# EAGLE board barbuddy (EAGLE 7.7.0)
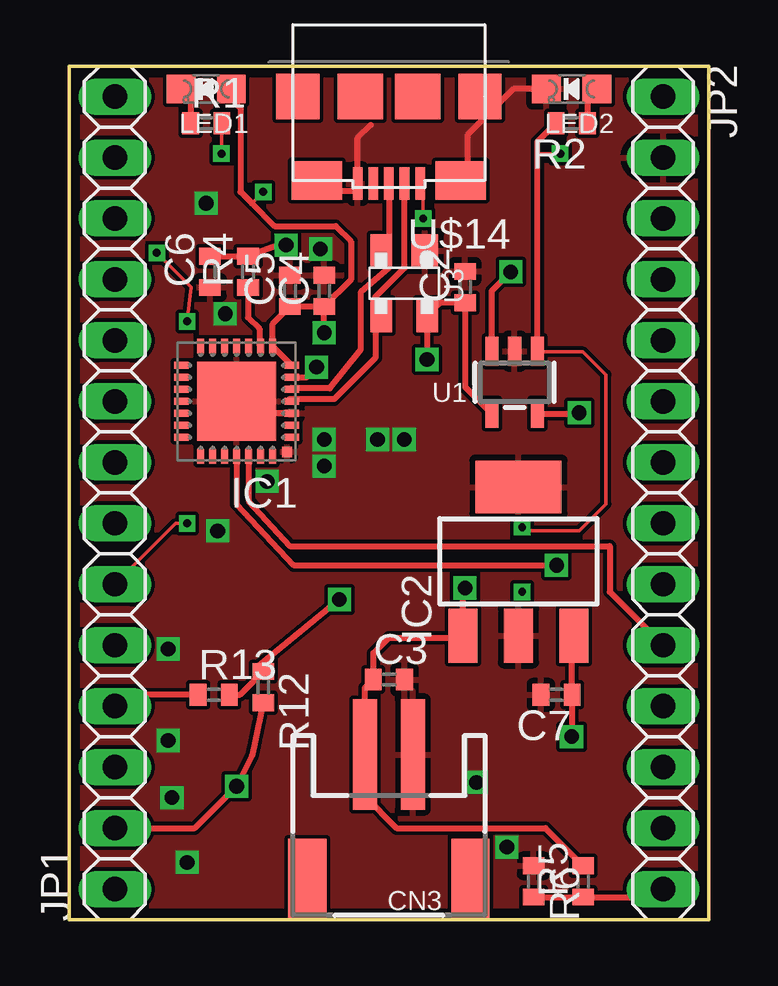
[diagram p0: board, top side]
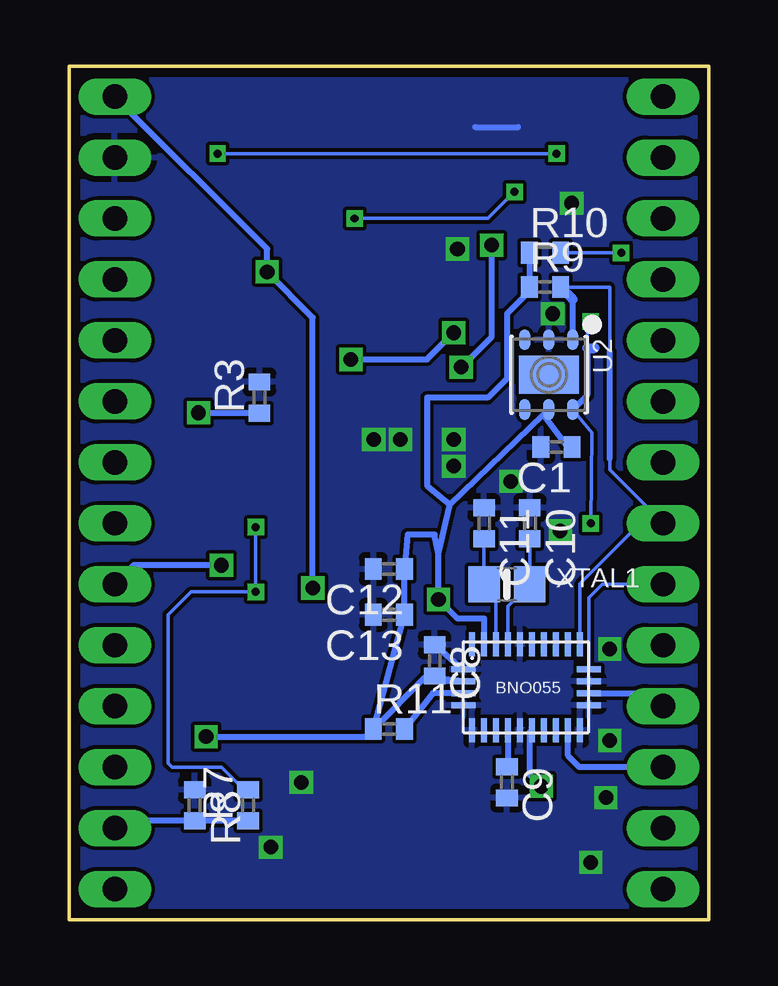
[diagram p1: board, bottom side, seen from below]

Size 26.67 x 35.56 mm. Coordinates in mm from the lower left corner, seen from the top.
Outline: 0,0 0,35.56 26.67,35.56 26.67,0 0,0
Copper layers (1*16): Top 0.0356mm / dielectric 1.5011mm / Bottom 0.0356mm
Design rules "LaenPCBOrder": minimum track width 6mil, minimum drill 13mil, track to track 6mil, track to pad 6mil, pad to pad 6mil, via to via 6mil, smd to smd 6mil, copper to edge 15mil, drill to drill 6mil, minimum pad ring 7mil, minimum via ring 7mil, stop-mask expansion 3mil, vias tented up to drill 0mil, thermal gap 10mil

## Footprints (pad centres in the part's own frame; a part is rotated, then mirrored left to right if it is on the bottom)
LGA-28 = smd 0.25 x 1: P$1 -2.25,1.787; P$6 -2.25,-1.787; P$7 -1.75,-1.787; P$8 -1.25,-1.787; P$9 -0.75,-1.787; P$10 -0.25,-1.787; P$11 0.25,-1.787; P$12 0.75,-1.787; P$13 1.25,-1.787; P$14 1.75,-1.787; P$15 2.25,-1.787; P$20 2.25,1.787; P$21 1.75,1.787; P$22 1.25,1.787; P$23 0.75,1.787; P$24 0.25,1.787; P$25 -0.25,1.787; P$26 -0.75,1.787; P$27 -1.25,1.787; P$28 -1.75,1.787 | smd 1 x 0.25: P$2 -2.612,0.75; P$3 -2.612,0.25; P$4 -2.612,-0.25; P$5 -2.612,-0.75; P$16 2.612,-0.75; P$17 2.612,-0.25; P$18 2.612,0.25; P$19 2.612,0.75
C0402 = smd 0.7 x 0.9: 1 -0.65,0; 2 0.65,0
JSTPH2 = smd 1 x 4.6: 1 -1,-3.7; 2 1,-3.7 | smd 1.6 x 3.4: NC1 -3.4,1.5; NC2 3.4,1.5
MLP28 = smd 0.6 x 0.3: 1 -2.3,1.5; 2 -2.3,1; 3 -2.3,0.5; 4 -2.3,0; 5 -2.3,-0.5; 6 -2.3,-1; 7 -2.3,-1.5; 15 2.3,-1.5; 16 2.3,-1; 17 2.3,-0.5; 18 2.3,0; 19 2.3,0.5; 20 2.3,1; 21 2.3,1.5 | smd 0.3 x 0.6: 8 -1.5,-2.3; 9 -1,-2.3; 10 -0.5,-2.3; 11 0,-2.3; 12 0.5,-2.3; 13 1,-2.3; 14 1.5,-2.3; 22 1.5,2.3; 23 1,2.3; 24 0.5,2.3; 25 0,2.3; 26 -0.5,2.3; 27 -1,2.3; 28 -1.5,2.3 | smd 3.3 x 3.3: EXP 0,0 | smd 0.435 x 0.435: M -2.103,2.103
SOT223 = smd 1.219 x 2.235: 1 -2.311,-3.099; 2 0,-3.099; 3 2.311,-3.099 | smd 3.6 x 2.2: 4 0,3.099
1X14 = drill 1.016 long: 1 -16.51,0; 2 -13.97,0; 3 -11.43,0; 4 -8.89,0; 5 -6.35,0; 6 -3.81,0; 7 -1.27,0; 8 1.27,0; 9 3.81,0; 10 6.35,0; 11 8.89,0; 12 11.43,0; 13 13.97,0; 14 16.51,0
CHIPLED_0805_NOOUTLINE = smd 1.2 x 1.2: A 0,-1.05; C 0,1.05
R0402 = smd 0.7 x 0.9: 1 -0.65,0; 2 0.65,0
SOT23-5 = smd 0.55 x 1.2: 1 -0.95,-1.3; 2 0,-1.3; 3 0.95,-1.3; 4 0.95,1.3; 5 -0.95,1.3
DFN6_3X3_SI = smd 0.85 x 0.45: 1 -1.45,1; 2 -1.45,0; 3 -1.45,-1; 4 1.45,-1; 5 1.45,0; 6 1.45,1 | smd 1.6 x 2.5: P$1 0,0
SOT143 = smd 1.4 x 1.1: 1 -1.35,0.86 | smd 1.4 x 0.9: 2 -1.35,-0.96; 3 1.35,-0.96; 4 1.35,0.96
MICROUSB-SMT = smd 0.4 x 1.35: P$1 -1.3,3.625; P$2 -0.65,3.625; P$3 0,3.625; P$4 0.65,3.625; P$5 1.3,3.625 | smd 2.1 x 1.6: SHLD@0 -3,3.5; SHLD@1 3,3.5 | smd 1.8 x 1.9: SHLD@2 -3.8,0; SHLD@5 3.8,0 | smd 1.9 x 1.9: SHLD@3 -1.2,0; SHLD@4 1.2,0
0805-NO = smd 1.3 x 1.5: 1 -0.95,0; 2 0.95,0

## Placement (x,y rotation side)
BNO055  BNO055  [LGA-28]  7.62,9.68 0 bottom
C1  0.1uF  [C0402]  6.35,19.68 180 bottom
C2  10µF  [C0402]  16.51,26.35 90 top
C3  10µF  [C0402]  13.34,10 0 top
C4  1µF  [C0402]  10.64,26.19 90 top
C5  .1µF  [C0402]  9.21,26.19 90 top
C6  .1µF  [C0402]  5.87,26.99 90 top
C7  3.3uf  [C0402]  20.32,9.37 180 top
C8  0.1uF  [C0402]  11.43,10.79 270 bottom
C9  0.1uF  [C0402]  8.41,5.71 270 bottom
C10  22pf  [C0402]  7.46,16.51 270 bottom
C11  22pf  [C0402]  9.37,16.51 270 bottom
C12  6.8nf  [C0402]  13.34,14.61 180 bottom
C13  120nf  [C0402]  13.34,12.7 180 bottom
CN3  JSTPH  [JSTPH2]  13.34,3.17 180 top
IC1  CP2102  [MLP28]  6.99,21.59 180 top
IC2  [SOT223]  18.73,14.92 0 top
JP1  [1X14]  1.91,17.78 90 top
JP2  [1X14]  24.77,17.78 270 top
LED1  RED  [CHIPLED_0805_NOOUTLINE]  5.71,34.61 90 top
LED2  GREEN  [CHIPLED_0805_NOOUTLINE]  20.95,34.61 90 top
R1  470  [R0402]  5.71,33.18 0 top
R2  470  [R0402]  20.95,33.18 180 top
R3  5K\  [R0402]  18.73,21.75 90 bottom
R4  4.7k  [R0402]  7.46,26.99 90 top
R5  33k  [R0402]  21.43,1.59 90 top
R6  100k  [R0402]  19.37,1.59 270 top
R7  33k  [R0402]  19.21,4.76 90 bottom
R8  100k  [R0402]  21.43,4.76 270 bottom
R9  10k  [R0402]  6.83,26.35 0 bottom
R10  10k  [R0402]  6.83,27.78 0 bottom
R11  10k  [R0402]  13.34,7.94 0 bottom
R12  10k  [R0402]  8.1,9.68 270 top
R13  10k  [R0402]  6.03,9.37 0 top
U1  MCP73831T-2ACI/OT  [SOT23-5]  18.57,22.38 180 top
U2  Si7021-A20  [DFN6_3X3_SI]  6.67,22.7 270 bottom
U3  SP0503BAHTG  [SOT143]  13.97,26.51 270 top
U$14  10118192-MICROUSB  [MICROUSB-SMT]  13.34,34.29 180 top
XTAL1  10k  [0805-NO]  8.41,13.97 0 bottom

## Library data of the parts
BNO055 = BNO055
C1-C13 R1-R13 = rcl
CN3 LED1 LED2 U1 U2 XTAL1 = microbuilder
IC1 = silabs; MF: FARNELL; MPN: CP2102-GM; OC_FARNELL: 9282130; OC_NEWARK: 30K5635
IC2 = linear-technology
JP1 JP2 = pinhead
U3 = littlefuse
U$14 = FCI-10118192-microusb

## Nets
BATT_SENSE: JP2.14 R5.1 R6.2
BNO_CAP: BNO055.P$9 C9.1
BNO_INT: BNO055.P$14 JP1.3
BNO_RST: BNO055.P$11 JP1.2 R12.2
CHG_PROG: R3.1 U1.5
CHG_SENSE: JP2.13 R7.1 R8.2
CHG_STATUS: R1.2 R2.2 R7.2 U1.1
CP2102_RST: IC1.9 R4.1
GND: BNO055.P$2 BNO055.P$5 BNO055.P$6 BNO055.P$10 BNO055.P$15 BNO055.P$16 BNO055.P$18 BNO055.P$25 C1.2 C2.2 C3.2 C4.2 C5.2 C6.1 C7.2 C8.1 C9.2 C10.1 C11.1 C12.2 C13.2 CN3.1 IC1.3 IC1.EXP IC1.M IC2.2 IC2.4 JP2.2 LED2.C R3.2 R6.1 R8.1 U1.2 U2.2 U3.1 U$14.P$5
I2C_ADDR_SEL: BNO055.P$17 JP1.4 R13.1
I2C_SCL: BNO055.P$19 JP1.6 R10.2 U2.6
I2C_SDA: BNO055.P$20 JP1.7 R9.2 U2.1
N$1: LED1.C R1.1
N$3: BNO055.P$4 R11.2
N$6: LED2.A R2.1
UART0_RX: IC1.26 JP2.10
UART0_TX: IC1.25 JP2.9
USB_N: IC1.4 U3.3 U$14.P$2
USB_P: IC1.5 U3.2 U$14.P$3
VBAT1: C3.1 CN3.2 IC2.1 JP2.1 R5.2 U1.3
VDD_3V3: BNO055.P$3 BNO055.P$28 C1.1 C7.1 C8.2 C12.1 C13.1 IC2.3 R9.1 R10.1 R11.1 R12.1 R13.2 U2.5
VDD_CP2102: C6.2 IC1.6 R4.2
VDD_USB: C2.1 C4.1 C5.1 IC1.7 IC1.8 LED1.A U1.4 U3.4 U$14.P$1
X_IN: BNO055.P$27 C11.2 XTAL1.1
X_OUT: BNO055.P$26 C10.2 XTAL1.2

## Tracks (layer width: path | path; a pad name or v marks a point on that pad's centre or on a via)
BATT_SENSE
  Top 0.254: R6.2 R5.1 24.43,0.94 JP2.14
BNO_CAP
  Bottom 0.254: BNO055.P$9 8.37,6.41 C9.1
BNO_INT
  Bottom 0.254: JP1.3 5.4,6.35 5.87,6.83 BNO055.P$14
BNO_RST  (via drill 0.61)
  Top 0.254: R12.2 7.62,6.83 v6.99,5.56 5.24,3.81 JP1.2
  Bottom 0.254: v6.99,5.56 7.46,6.03 7.46,7.81 BNO055.P$11
CHG_PROG  (via drill 0.61)
  Top 0.254: U1.5 21.24,21.08 v21.27,21.11
  Bottom 0.254: v21.27,21.11 18.75,21.11 R3.1
CHG_SENSE
  Bottom 0.254: R7.1 R8.2 24.46,4.11 JP2.13
CHG_STATUS  (via drill 0.33)
  Top 0.152: v18.89,16.35 18.73,16.19 21.27,16.19 22.38,17.3 22.38,22.7 21.43,23.65 19.55,23.65 U1.1 | R1.2 6.35,33.18 v6.35,31.91 | v20.48,31.91 19.52,31.91
  Top 0.254: U1.1 19.52,31.91 19.52,32.4 R2.2
  Bottom 0.152: R7.2 19.38,5.41 20.32,6.35 22.38,6.35 22.54,6.51 22.54,12.7 21.59,13.65 v18.89,13.65 v18.89,16.35 | v6.35,31.91 v20.48,31.91
CP2102_RST
  Top 0.254: R4.1 7.46,25.08 7.94,24.61 7.94,23.94 IC1.9
GND  (via drill 0.61)
  Top 0.254: LED2.C 18.53,34.61 16.64,32.72 16.64,30.21 | 10.04,30.21 10.16,30.34 12.04,30.34 12.04,32.56 12.59,33.12 | IC1.EXP 7.94,21.59 8.41,21.11 9.26,21.11 IC1.3
  Bottom 0.254: BNO055.P$2 10.26,10.43 C8.1 | 9.73,33.02 7.94,33.02
  other vias: 18.26,3.02 16.99,5.71 5.71,29.84 12.86,20 13.97,20 8.26,18.26 6.19,16.19 4.13,11.27 4.92,2.38 4.13,7.46 4.29,5.08 10.48,27.94 10.64,20 10.64,18.89 6.51,25.24
  pour Bottom: 0,35.56 0,0 26.67,0 26.67,35.56
  pour Top: 0,35.56 0,0 26.67,0 26.67,35.56
I2C_ADDR_SEL
  Top 0.254: R13.1 2.38,9.37 JP1.4
  Bottom 0.254: BNO055.P$17 2.45,9.43 JP1.4
I2C_SCL  (via drill 0.33)
  Top 0.152: v4.92,16.51 4.45,16.51 JP1.6 | v4.92,24.92 5.08,26.35 v3.65,27.78
  Bottom 0.152: BNO055.P$19 5.01,13.41 4.45,13.97 JP1.6 | U2.6 4.87,20.27 v4.92,16.51 | 5.07,23.81 5.07,24.91 v4.92,24.92 | v3.65,27.78 R10.2
  Bottom 0.254: 5.07,23.81 5.07,21.85 U2.6
  Bottom 0.406: 5.07,23.81 4.76,23.81
I2C_SDA
  Bottom 0.152: BNO055.P$20 5.37,14 2.86,16.51 JP1.7 4.13,18.73 4.13,19.21 | 4.13,23.65 4.13,26.35 R9.2
  Bottom 0.254: 4.13,19.21 4.13,23.65 | U2.1 5.67,25.84
  Bottom 0.406: 5.67,25.84 R9.2
N$1
  Top 0.254: LED1.C 5.07,34.61 R1.1
N$3
  Bottom 0.254: BNO055.P$4 11.51,9.43 R11.2
N$6
  Top 0.254: LED2.A 21.61,34.61 R2.1
UART0_RX
  Top 0.254: JP2.10 22.54,13.65 22.54,15.56 9.21,15.56 7.49,17.44 IC1.26
UART0_TX  (via drill 0.61)
  Top 0.254: IC1.25 6.99,17.3 9.37,14.76 v20.32,14.76
  Bottom 0.254: v20.32,14.76 23.97,14.76 JP2.9
USB_N
  Top 0.152: 13.98,30.34 13.97,30.34 13.97,30.65 U$14.P$2 | 9.21,21.68 9.28,21.68 9.37,21.59
  Top 0.254: 12.77,25.08 12.77,25.94 13.98,27.16 U$14.P$2 | 12.77,25.08 12.77,23.4 11.05,21.68 9.37,21.68 | 9.37,21.68 9.21,21.68 | U3.3 12.85,25.16 12.77,25.08 | IC1.4 9.37,21.68
USB_P
  Top 0.152: 13.34,30.96 U$14.P$3 13.34,30.34
  Top 0.254: 13.34,30.34 13.34,27.78 | 13.34,27.78 13.34,27.15 12.15,26.13 12.15,23.75 10.86,22.14 9.21,22.14 9.25,22.09 IC1.5 | U3.2 13.26,27.86 13.34,27.78
VBAT1  (via drill 0.61)
  Top 0.254: U1.3 17.62,26.2 v18.41,26.99 | R5.2 19.86,3.81 13.65,3.81 12.34,5.13 CN3.2 12.34,9.65 C3.1 12.69,11.1 13.34,11.75 16.34,11.75 IC2.1 16.42,13.72 v16.51,13.81
  Bottom 0.254: JP2.1 18.41,27.94 v18.41,26.99 16.51,25.08 v16.51,13.81
VDD_3V3  (via drill 0.61)
  Top 0.254: IC2.3 20.97,11.75 C7.1 20.97,7.63 v20.95,7.62 | v11.27,13.34 7.79,10.49 R12.1 7.13,9.37 R13.2
  Bottom 0.254: R10.1 R9.1 7.48,26.18 8.41,25.24 8.41,22.54 9.21,21.75 11.75,21.75 11.75,18.08 10.79,17.28 | C8.2 11.06,9.93 BNO055.P$3 11.83,10.09 R11.1 | R11.1 C13.1 C12.1 12.56,16.03 11.43,16.03 11.27,15.24 | 11.27,15.24 v11.27,13.34 10.48,12.54 9.37,12.54 BNO055.P$28 | 11.27,15.24 10.79,17.28 | 10.79,17.28 6.89,21.02 | 6.89,21.02 U2.5 | C1.1 5.87,19.68 6.89,21.02 | v20.95,7.62 14.3,7.62 R11.1
VDD_CP2102  (via drill 0.61)
  Top 0.254: C6.2 R4.2 8.72,28.1 v9.05,28.1 | IC1.6 9.89,22.59 v10.32,23.02
  Bottom 0.254: v10.32,23.02 9.05,24.29 v9.05,28.1
VDD_USB  (via drill 0.33, 0.61)
  Top 0.152: U$14.P$1 14.76,30.35 v14.76,29.21 | v8.1,30.32 7.62,29.84
  Top 0.254: C4.1 C5.1 8.48,24.82 IC1.8 IC1.7 | U1.4 16.51,22.2 C2.1 15.47,25.7 U3.4 v14.93,23.34 v14.92,23.34 | v10.64,24.45 C4.1 | LED1.A 6.76,34.19 7.14,33.81 7.14,30.32 7.62,29.84 8.57,28.89 11.11,28.89 11.75,28.26 11.75,26.66 C4.1
  Bottom 0.152: v14.76,29.21 9.21,29.21 v8.1,30.32
  Bottom 0.254: v10.64,24.45 11.75,23.34 v14.92,23.34 15.08,23.5
X_IN
  Bottom 0.152: BNO055.P$27 8.87,13.48 XTAL1.1 C11.2
  Bottom 0.254: 9.05,13.97 XTAL1.1
X_OUT
  Bottom 0.152: BNO055.P$26 8.37,13.06 XTAL1.2 C10.2
  Bottom 0.254: 7.14,13.97 XTAL1.2